# EAGLE board Final - Ready to be Milled LVRearBoard_GNDPour V2.0 100% (EAGLE 7.2.0)
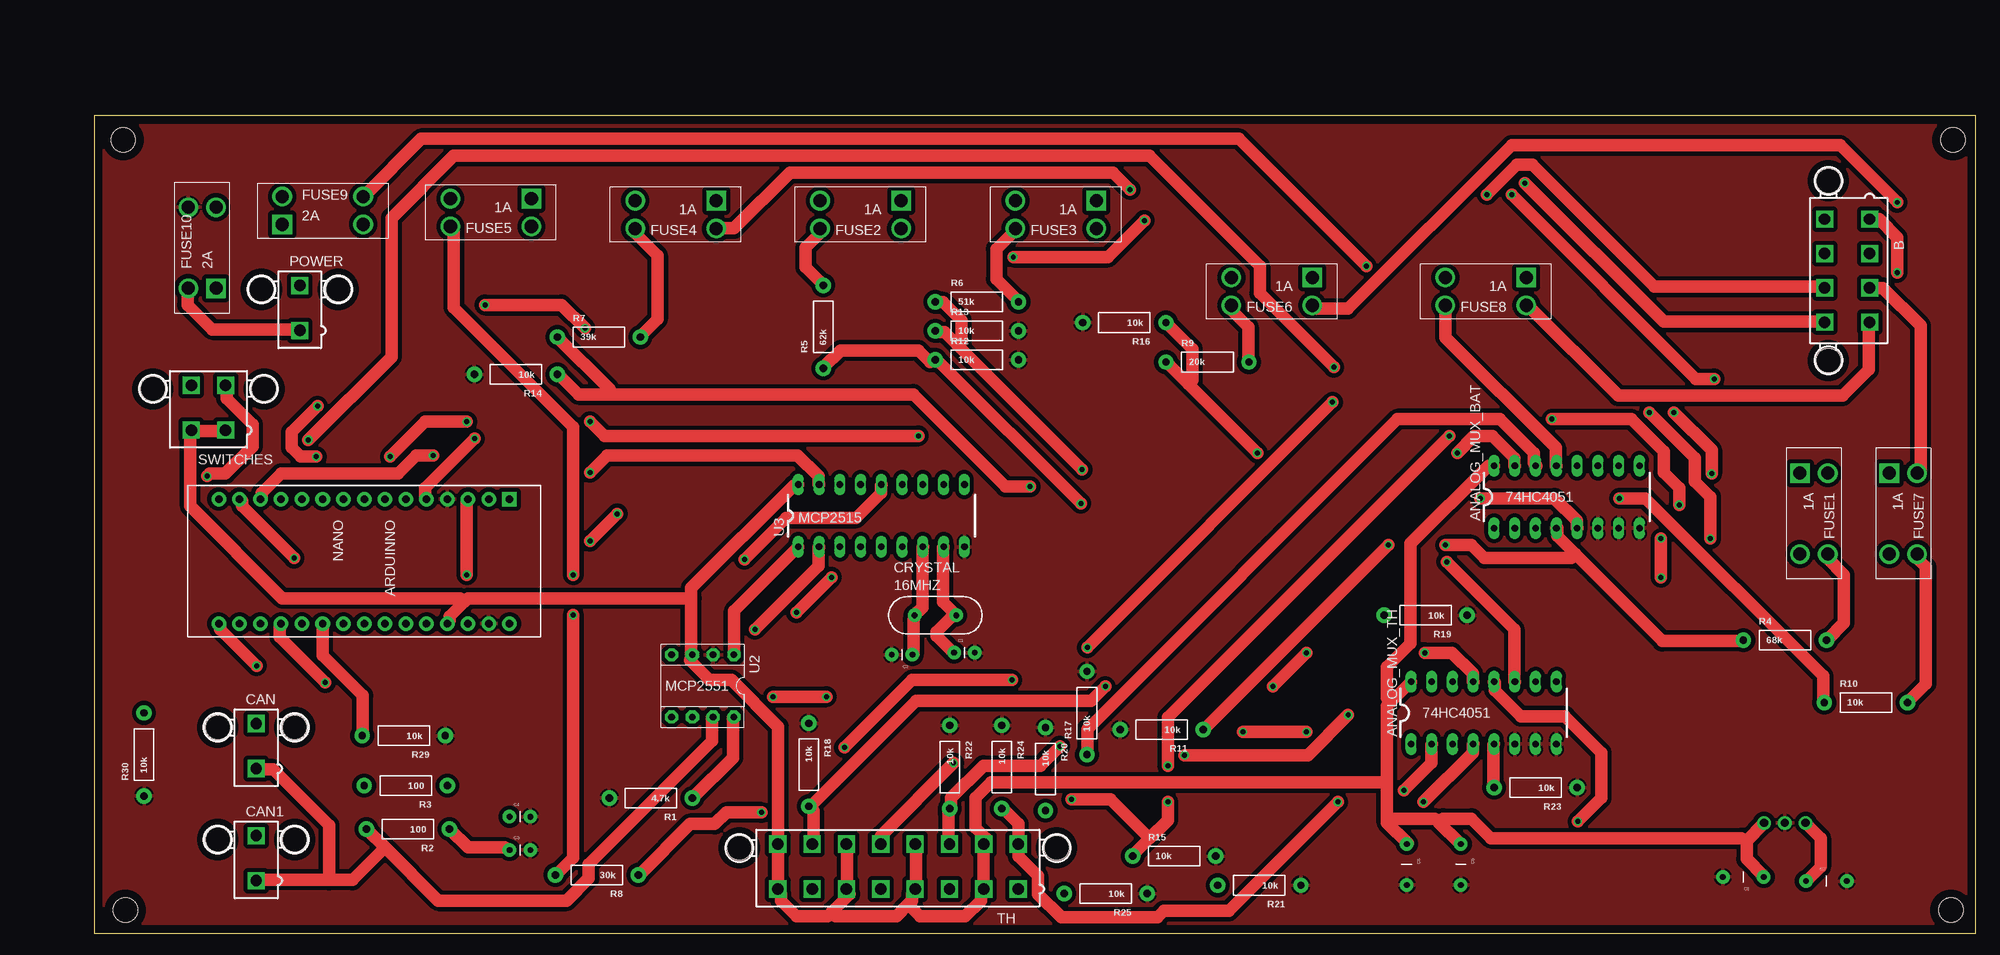
[diagram p0: board, top side]
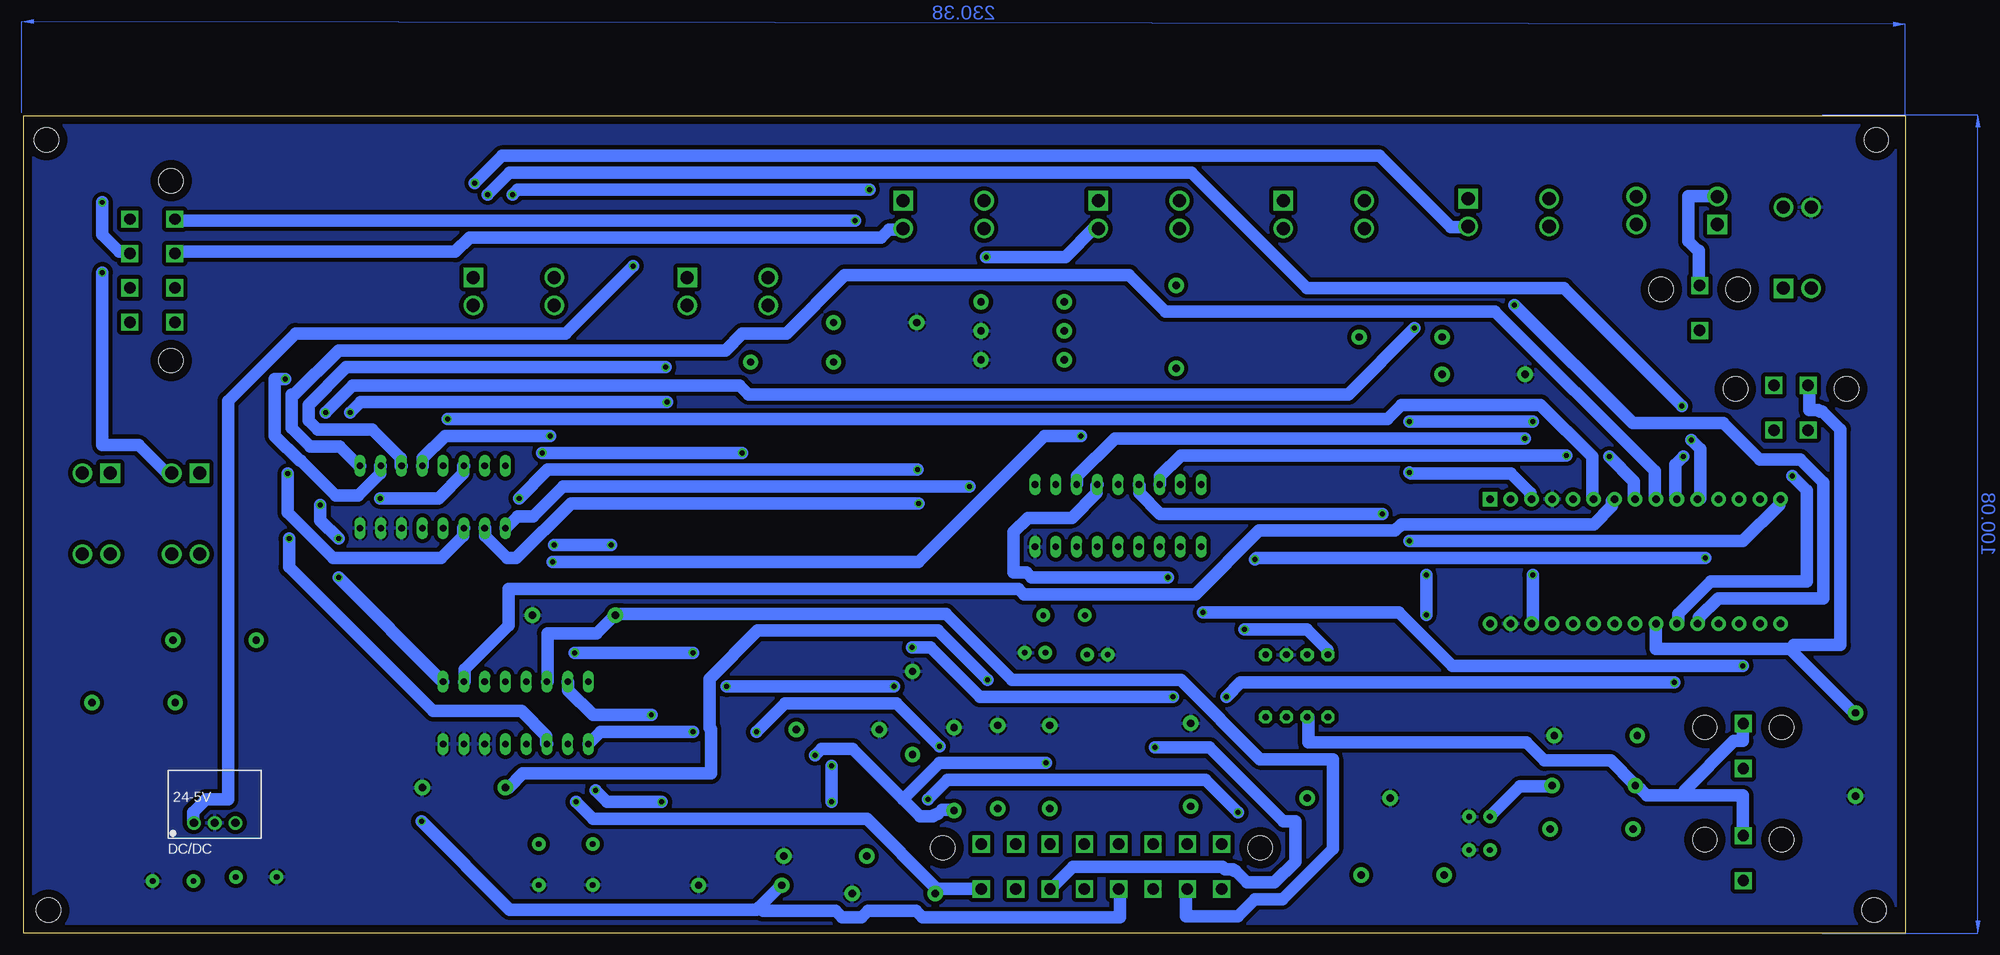
[diagram p1: board, bottom side, seen from below]

Size 230.1 x 100 mm. Coordinates in mm from the lower left corner, seen from the top.
Outline: 0,0 230.1,0 230.1,100 0,100 0,0
Copper layers (1*16): Top 0.035mm / dielectric 1.5mm / Bottom 0.035mm
Design rules "default": minimum track width 10mil, minimum drill 24mil, track to track 8mil, track to pad 8mil, pad to pad 8mil, via to via 8mil, smd to smd 8mil, copper to edge 40mil, drill to drill 8mil, minimum pad ring 10mil, minimum via ring 8mil, stop-mask expansion 4mil, vias tented up to drill 0mil, thermal gap 10mil
Net classes: 0 default: width 1.524 mm, clearance 0.508 mm; 1 Ground: width 1.524 mm, clearance 0.508 mm; 2 High Power: width 1.524 mm, clearance 0.508 mm; 3 Midium Power: width 1.524 mm, clearance 0.508 mm; 4 Low Power: width 1.524 mm, clearance 0.508 mm
Holes 3 mm at 3.56,97.03 3.81,2.79 227.08,2.79 227.33,97.03

## Footprints (pad centres in the part's own frame; a part is rotated, then mirrored left to right if it is on the bottom)
DIL16 = drill 0.813 long: 1 -8.89,-3.81; 2 -6.35,-3.81; 3 -3.81,-3.81; 4 -1.27,-3.81; 5 1.27,-3.81; 6 3.81,-3.81; 7 6.35,-3.81; 8 8.89,-3.81; 9 8.89,3.81; 10 6.35,3.81; 11 3.81,3.81; 12 1.27,3.81; 13 -1.27,3.81; 14 -3.81,3.81; 15 -6.35,3.81; 16 -8.89,3.81
ARDUINO-NANO = drill 0.914 pad 1.778 square: 1 -7.62,17.78 | drill 0.914 pad 1.778: 2 -7.62,15.24; 3 -7.62,12.7; 4 -7.62,10.16; 5 -7.62,7.62; 6 -7.62,5.08; 7 -7.62,2.54; 8 -7.62,0; 9 -7.62,-2.54; 10 -7.62,-5.08; 11 -7.62,-7.62; 12 -7.62,-10.16; 13 -7.62,-12.7; 14 -7.62,-15.24; 15 -7.62,-17.78; 16 7.62,-17.78; 17 7.62,-15.24; 18 7.62,-12.7; 19 7.62,-10.16; 20 7.62,-7.62; 21 7.62,-5.08; 22 7.62,-2.54; 23 7.62,0; 24 7.62,2.54; 25 7.62,5.08; 26 7.62,7.62; 27 7.62,10.16; 28 7.62,12.7; 29 7.62,15.24; 30 7.62,17.78
5566-8 = drill 1.4 square: 1 6.3,-2.75; 2 2.1,-2.75; 3 -2.1,-2.75; 4 -6.3,-2.75; 5 6.3,2.75; 6 2.1,2.75; 7 -2.1,2.75; 8 -6.3,2.75 | hole 3: 11,2.29; -11,2.29
CAP-PTH-SMALL = drill 0.7 pad 1.651: 1 0,0; 2 2.54,0
CAP-PTH-5MM = drill 0.7 pad 1.651: 1 -2.5,0; 2 2.5,0
5566-2 = drill 1.4 square: 1 0,-2.75; 2 0,2.75 | hole 3: 4.7,2.29; -4.7,2.29
HC49US = drill 0.7 pad 1.651: 1 -2.54,0; 2 2.54,0
SIP3 = drill 1 pad 1.676: 1 -2.54,0; 2 0,0; 3 2.54,0
KEYSTONE3568 = drill 1.6: 1A -4.953,1.702; 2A 4.953,1.702; 2B 4.953,-1.702 | drill 1.6 square: 1B -4.953,-1.702
AXIAL-0.4 = drill 0.9 pad 1.88: P$1 -5.08,0; P$2 5.08,0
5566-4 = drill 1.4 square: 1 2.1,-2.75; 2 -2.1,-2.75; 3 2.1,2.75; 4 -2.1,2.75 | hole 3: 6.8,2.29; -6.8,2.29
5566-16 = drill 1.4 square: 1 14.7,-2.75; 2 10.5,-2.75; 3 6.3,-2.75; 4 2.1,-2.75; 5 -2.1,-2.75; 6 -6.3,-2.75; 7 -10.5,-2.75; 8 -14.7,-2.75; 9 14.7,2.75; 10 10.5,2.75; 11 6.3,2.75; 12 2.1,2.75; 13 -2.1,2.75; 14 -6.3,2.75; 15 -10.5,2.75; 16 -14.7,2.75 | hole 3: 19.4,2.29; -19.4,2.29
DIL08 = drill 0.813 pad 1.6 octagon: 1 -3.81,-3.81; 2 -1.27,-3.81; 3 1.27,-3.81; 4 3.81,-3.81; 5 3.81,3.81; 6 1.27,3.81; 7 -1.27,3.81; 8 -3.81,3.81
DIL18 = drill 0.813 long: 1 -10.16,-3.81; 2 -7.62,-3.81; 3 -5.08,-3.81; 4 -2.54,-3.81; 5 0,-3.81; 6 2.54,-3.81; 7 5.08,-3.81; 8 7.62,-3.81; 9 10.16,-3.81; 10 10.16,3.81; 11 7.62,3.81; 12 5.08,3.81; 13 2.54,3.81; 14 0,3.81; 15 -2.54,3.81; 16 -5.08,3.81; 17 -7.62,3.81; 18 -10.16,3.81

## Placement (x,y rotation side)
ANALOG_MUX_BAT  74HC4051  [DIL16]  180.09,53.34 0 top
ANALOG_MUX_TH  74HC4051  [DIL16]  169.93,26.92 0 top
ARDUINNO  NANO  [ARDUINO-NANO]  33.02,45.47 270 top
B  5566-8  [5566-8]  214.38,81.03 90 top
C1  22pF  [CAP-PTH-SMALL]  105.16,34.29 0 top
C2  22pF  [CAP-PTH-SMALL]  100.08,34.04 180 top
C3  560pF  [CAP-PTH-SMALL]  50.8,10.16 0 top
C4  560pF  [CAP-PTH-SMALL]  50.8,14.22 0 top
C5  0.1uF  [CAP-PTH-5MM]  167.13,8.38 270 top
C6  0.1uF  [CAP-PTH-5MM]  160.53,8.38 270 top
C7  [CAP-PTH-5MM]  211.84,6.35 0 top
C8  [CAP-PTH-5MM]  201.68,6.86 180 top
CAN  5566-2  [5566-2]  19.81,22.86 0 top
CAN1  5566-2  [5566-2]  19.81,9.14 0 top
CRYSTAL  16MHZ  [HC49US]  102.87,38.86 0 top
DC/DC  24-5V  [SIP3]  206.76,13.46 0 bottom
FUSE1  1A  [KEYSTONE3568]  210.31,51.31 270 top
FUSE2  1A  [KEYSTONE3568]  93.73,87.88 180 top
FUSE3  1A  [KEYSTONE3568]  117.6,87.88 180 top
FUSE4  1A  [KEYSTONE3568]  71.12,87.88 180 top
FUSE5  1A  [KEYSTONE3568]  48.51,88.14 180 top
FUSE6  1A  [KEYSTONE3568]  144.02,78.49 180 top
FUSE7  1A  [KEYSTONE3568]  221.23,51.31 270 top
FUSE8  1A  [KEYSTONE3568]  170.18,78.49 180 top
FUSE9  2A  [KEYSTONE3568]  27.94,88.39 0 top
FUSE10  2A  [KEYSTONE3568]  13.21,83.82 90 top
POWER  5566-2  [5566-2]  25.15,76.45 0 top
R1  4.7k  [AXIAL-0.4]  68.07,16.51 180 top
R2  100  [AXIAL-0.4]  38.35,12.7 180 top
R3  100  [AXIAL-0.4]  38.1,18.03 180 top
R4  68k  [AXIAL-0.4]  206.76,35.81 0 top
R5  62k  [AXIAL-0.4]  89.15,74.17 90 top
R6  51k  [AXIAL-0.4]  107.95,77.22 0 top
R7  39k  [AXIAL-0.4]  61.72,72.9 0 top
R8  30k  [AXIAL-0.4]  61.47,7.11 180 top
R9  20k  [AXIAL-0.4]  136.14,69.85 0 top
R10  10k  [AXIAL-0.4]  216.66,28.19 0 top
R11  10k  [AXIAL-0.4]  130.56,24.89 180 top
R12  10k  [AXIAL-0.4]  107.95,70.1 0 top
R13  10k  [AXIAL-0.4]  107.95,73.66 0 top
R14  10k  [AXIAL-0.4]  51.56,68.33 180 top
R15  10k  [AXIAL-0.4]  132.08,9.4 0 top
R16  10k  [AXIAL-0.4]  125.98,74.68 180 top
R17  10k  [AXIAL-0.4]  121.41,26.92 90 top
R18  10k  [AXIAL-0.4]  87.38,20.57 270 top
R19  10k  [AXIAL-0.4]  162.81,38.86 180 top
R20  10k  [AXIAL-0.4]  116.33,20.07 270 top
R21  10k  [AXIAL-0.4]  142.49,5.84 180 top
R22  10k  [AXIAL-0.4]  104.65,20.32 270 top
R23  10k  [AXIAL-0.4]  176.28,17.78 180 top
R24  10k  [AXIAL-0.4]  111,20.32 270 top
R25  10k  [AXIAL-0.4]  123.7,4.83 180 top
R29  10k  [AXIAL-0.4]  37.85,24.13 180 top
R30  10k  [AXIAL-0.4]  6.1,21.84 90 top
SWITCHES  5566-4  [5566-4]  13.97,64.26 0 top
TH  5566-16  [5566-16]  98.3,8.13 0 top
U2  MCP2551  [DIL08]  74.42,30.23 180 top
U3  MCP2515  [DIL18]  96.27,51.05 0 top

## Library data of the parts
ANALOG_MUX_BAT ANALOG_MUX_TH = SparkFun-AnalogIC
ARDUINNO = Arduino Nano2
B SWITCHES TH = con-molex; OC_FARNELL: unknown; OC_NEWARK: unknown
C1-C4 = SparkFun-Passives
C5-C8 = SparkFun-Capacitors
CAN CAN1 POWER = con-molex; OC_FARNELL: 1822072; OC_NEWARK: unknown
CRYSTAL = SparkFun-FreqCtrl
DC/DC = dc-dc-converter
FUSE1-FUSE10 = fuse
R1-R25 R29 R30 = SparkFun-Resistors
U2 U3 = SparkFun-DigitalIC

## Nets
3V3: ARDUINNO.17
5V [Low Power]: ANALOG_MUX_BAT.16 ANALOG_MUX_TH.16 ARDUINNO.27 C5.1 C6.1 C8.1 DC/DC.3 SWITCHES.1 SWITCHES.2 TH.2 TH.4 TH.6 TH.8 TH.10 TH.12 TH.14 TH.16 U2.3 U3.18
A_BAT: ANALOG_MUX_BAT.11 ARDUINNO.11
A_TH: ANALOG_MUX_TH.11 ARDUINNO.8
ANALOG_BAT: ANALOG_MUX_BAT.3 ARDUINNO.20
ANALOG_TH: ANALOG_MUX_TH.3 ARDUINNO.19
B3 [Midium Power]: ANALOG_MUX_BAT.13 FUSE8.2A
B6 [Midium Power]: ANALOG_MUX_BAT.14 R10.P$1 R17.P$1
B9: ANALOG_MUX_BAT.15 R9.P$1 R16.P$1
B12 [Midium Power]: ANALOG_MUX_BAT.12 R8.P$1 R15.P$1
B15 [Midium Power]: ANALOG_MUX_BAT.1 R7.P$1 R14.P$1
B18 [Midium Power]: ANALOG_MUX_BAT.5 R6.P$1 R13.P$1
B21 [Midium Power]: ANALOG_MUX_BAT.2 R5.P$1 R12.P$1
B24 [Midium Power]: ANALOG_MUX_BAT.4 R4.P$1 R11.P$1
B_BAT: ANALOG_MUX_BAT.10 ARDUINNO.10
B_TH: ANALOG_MUX_TH.10 ARDUINNO.7
BMS: ARDUINNO.22 R30.P$2 SWITCHES.4
C_BAT: ANALOG_MUX_BAT.9 ARDUINNO.9
C_TH: ANALOG_MUX_TH.9 ARDUINNO.6
CAN_CS: ARDUINNO.13 U3.16
CAN_INT: ARDUINNO.5 U3.12
CAN_TX: U2.1 U3.1
CANH: CAN1.1 CAN.1 R2.P$2 U2.7
CANL: CAN1.2 CAN.2 R3.P$2 U2.6
GND: ANALOG_MUX_BAT.6 ANALOG_MUX_BAT.7 ANALOG_MUX_BAT.8 ANALOG_MUX_TH.6 ANALOG_MUX_TH.7 ANALOG_MUX_TH.8 ARDUINNO.4 ARDUINNO.29 C1.2 C2.2 C3.2 C4.2 C5.2 C6.2 C7.2 C8.2 DC/DC.2 FUSE10.2A R1.P$2 R11.P$2 R12.P$2 R13.P$2 R14.P$2 R15.P$2 R16.P$2 R17.P$2 R18.P$1 R19.P$1 R20.P$1 R21.P$1 R22.P$1 R23.P$1 R24.P$1 R25.P$1 R29.P$1 R30.P$1 U2.2 U3.9
IMD: ARDUINNO.21 R29.P$2 SWITCHES.3
MISO: ARDUINNO.15 U3.15
MOSI: ARDUINNO.14 U3.14
N$1 [High Power]: FUSE9.1A POWER.2
N$2: C3.1 R2.P$1
N$3: B.8 FUSE5.1A
N$4: C2.1 CRYSTAL.1 U3.7
N$5: C4.1 R3.P$1
N$6: B.7 FUSE4.1A
N$7: C7.1 DC/DC.1 FUSE9.2A
N$8 [Midium Power]: FUSE2.2A R5.P$2
N$9 [Midium Power]: FUSE1.2A R4.P$2
N$10 [Midium Power]: FUSE3.2A R6.P$2
N$11 [Midium Power]: FUSE4.2A R7.P$2
N$12 [Midium Power]: FUSE5.2A R8.P$2
N$13 [Midium Power]: FUSE6.2A R9.P$2
N$14 [Midium Power]: FUSE7.2A R10.P$2
N$15: B.6 FUSE3.1A
N$16: B.5 FUSE2.1A
N$17: B.1 FUSE1.1A
N$18: B.2 FUSE6.1A
N$20: B.3 FUSE7.1A
N$21: B.4 FUSE8.1A
N$22 [Ground]: FUSE10.1A POWER.1
N$29: U2.4 U3.2
OSC1: C1.1 CRYSTAL.2 U3.8
RS: ARDUINNO.3 ARDUINNO.28 U3.17
RS$: R1.P$1 U2.8
SCK: ARDUINNO.16 U3.13
TH1: ANALOG_MUX_TH.13 R18.P$2 TH.15
TH2: ANALOG_MUX_TH.14 R19.P$2 TH.7
TH3: ANALOG_MUX_TH.15 R20.P$2 TH.13
TH4: ANALOG_MUX_TH.12 R21.P$2 TH.5
TH5: ANALOG_MUX_TH.1 R22.P$2 TH.11
TH6: ANALOG_MUX_TH.5 R23.P$2 TH.3
TH7: ANALOG_MUX_TH.2 R24.P$2 TH.9
TH8: ANALOG_MUX_TH.4 R25.P$2 TH.1
VIN: ARDUINNO.30

## Tracks (layer width: path | path; a pad name or v marks a point on that pad's centre or on a via)
5V
  Top 1.524: 202.09,11.27 202.09,9.05 204.15,6.99 C8.1 | 202.09,11.27 204.15,13.34 DC/DC.3 | 158.59,28.26 158.12,27.78 158.12,18.41 | 158.59,28.26 160.97,30.64 ANALOG_MUX_TH.16 | 158.12,13.97 158.12,13.49 160.66,10.95 C6.1 | 158.12,13.97 158.12,18.41 | ANALOG_MUX_BAT.16 170.5,57.15 160.97,47.62 160.97,35.4 158.12,32.54 158.12,28.73 158.59,28.26 | 164.47,13.49 163.99,13.97 158.12,13.97 | 164.47,13.49 167,10.95 C5.1 | 202.09,11.27 201.45,11.59 170.81,11.59 168.43,13.97 164.94,13.97 164.47,13.49 | TH.12 100.49,10.79 100.49,5.4 TH.4 100.01,4.76 100.01,3.97 99.54,3.49 | TH.14 92.08,10.79 92.08,5.4 TH.6 92.39,4.76 90.17,2.54 | 90.17,2.54 89.69,2.06 85.88,2.06 83.98,3.97 83.98,4.76 TH.8 83.66,5.4 83.66,10.79 TH.16 83.66,11.59 83.66,25.24 77.95,30.96 75.25,30.96 72.87,33.34 U2.3 73.03,34.13 73.03,40.96 | 99.54,3.49 98.11,2.06 90.65,2.06 90.17,2.54 | 99.54,3.49 100.97,2.06 106.52,2.06 108.43,3.97 108.43,4.76 TH.2 108.74,5.4 108.74,10.79 TH.10 109.06,11.59 107.79,12.86 107.79,16.51 109.7,18.41 158.12,18.41 | SWITCHES.1 16.03,61.44 11.91,61.44 SWITCHES.2 11.75,60.8 11.75,52.23 23.02,40.96 44.77,40.96 45.24,40.48 | 73.03,40.96 73.03,42.23 85.57,54.77 86.04,54.77 U3.18 | 45.24,40.48 45.72,40.96 73.03,40.96 | 45.24,40.48 43.5,38.73 43.5,38.26 43.18,37.94 ARDUINNO.27
A_BAT  (via drill 0.61)
  Top 1.524: v151.61,69.22 142.56,78.26 142.56,81.6 129.06,95.09 43.97,95.09 36.35,87.47 36.35,70.48 v26.19,60.33
  Bottom 1.524: v151.61,69.22 190.66,69.22 195.26,64.61 195.26,62.71 194.15,61.59 187.48,61.59 183.99,58.1 183.99,57.15 ANALOG_MUX_BAT.11 | v26.19,60.33 25.08,59.21 25.08,53.18 25.4,53.18 ARDUINNO.11
A_TH  (via drill 0.61)
  Top 1.524: v165.42,45.4 173.67,37.15 173.67,30.8 ANALOG_MUX_TH.11 | v100.81,60.8 62.39,60.8 v60.64,62.55 | v45.56,62.55 40.48,62.55 v36.2,58.26
  Bottom 1.524: v165.42,45.4 120.65,45.4 105.25,60.8 v100.81,60.8 | v45.56,62.55 v60.64,62.55 | v36.2,58.26 33.18,55.24 33.18,53.02 33.02,53.02 ARDUINNO.8
ANALOG_BAT  (via drill 0.61)
  Top 1.524: v197.8,56.2 197.8,59.05 v193.2,63.66 | v60.01,73.98 57.15,76.83 v47.78,76.83
  Bottom 1.524: v197.8,56.2 197.8,51.44 192.25,45.88 179.07,45.88 176.37,48.58 176.37,49.53 ANALOG_MUX_BAT.3 | v193.2,63.66 189.87,66.99 142.56,66.99 141.45,65.88 68.1,65.88 v60.01,73.98 | v47.78,76.83 33.34,62.39 22.23,62.39 17.78,57.94 12.86,57.94 10,55.09 10,40.96 22.86,40.96 25.24,38.58 25.24,37.78 25.4,37.78 ARDUINNO.20
ANALOG_TH  (via drill 0.61)
  Top 1.524: v197.64,48.26 197.64,53.34 195.74,55.24 195.74,58.1 v190.18,63.66 | v121.44,34.92 v151.45,64.93 | v83.03,28.89 v89.53,28.89 | v28.26,30.64 22.7,36.2 22.7,37.78 22.86,37.94 ARDUINNO.19
  Bottom 1.524: v197.64,48.26 197.64,44.77 180.02,27.15 169.23,27.15 166.21,24.13 166.21,23.18 ANALOG_MUX_TH.3 | v190.18,63.66 188.91,64.93 v151.45,64.93 | v121.44,34.92 119.22,34.92 113.19,28.89 v89.53,28.89 | v83.03,28.89 81.28,30.64 v28.26,30.64
B3
  Top 1.524: ANALOG_MUX_BAT.13 178.75,57.15 178.75,59.37 165.26,72.87 165.26,76.68 FUSE8.2A
B6  (via drill 0.61)
  Top 1.524: v186.53,53.18 189.71,53.18 211.46,31.43 211.46,28.26 R10.P$1 | R17.P$1 121.44,21.91 121.44,24.92 159.38,62.87 171.93,62.87 176.05,58.74 176.05,57.47 176.37,57.15 ANALOG_MUX_BAT.14
  Bottom 1.524: v186.53,53.18 179.39,53.18 176.37,56.2 176.37,57.15 ANALOG_MUX_BAT.14
B9  (via drill 0.61)
  Top 1.524: v166.69,58.74 168.75,60.8 170.97,60.8 173.67,58.1 173.67,57.15 ANALOG_MUX_BAT.15 | 133.83,67.15 131.13,69.85 R9.P$1 | 133.83,67.15 v142.24,58.74 | R16.P$1 134.3,71.44 134.3,67.63 133.83,67.15
  Bottom 1.524: v142.24,58.74 v166.69,58.74
B12  (via drill 0.61)
  Top 1.524: v165.74,60.8 131.29,26.35 v131.29,20.48 | v131.29,16.03 131.29,13.81 129.06,11.59 | 129.06,11.59 127,9.53 R15.P$1 | v81.6,14.76 77.31,14.76 75.88,13.34 72.87,13.34 66.67,7.14 R8.P$1 | v119.54,16.35 124.3,16.35 129.06,11.59
  Bottom 1.524: v165.74,60.8 178.59,60.8 181.29,58.1 181.29,57.15 ANALOG_MUX_BAT.12 | v131.29,16.03 v131.29,20.48 | v81.6,14.76 85.57,18.73 117.16,18.73 v119.54,16.35
B15  (via drill 0.61)
  Top 1.524: v114.46,54.61 111.44,54.61 100.17,65.88 63.02,65.88 | 63.02,65.88 59.21,65.88 56.67,68.42 R14.P$1 | R7.P$1 63.02,66.52 63.02,65.88
  Bottom 1.524: v114.46,54.61 164.15,54.61 167.8,50.96 169.7,50.96 171.13,49.53 ANALOG_MUX_BAT.1
B18  (via drill 0.61)
  Top 1.524: v169.54,53.18 178.59,53.18 181.29,50.48 181.29,49.53 ANALOG_MUX_BAT.5 | 105.57,71.91 103.98,73.5 103.19,73.5 103.03,73.66 R13.P$1 | 105.57,71.91 v120.81,56.67 | R6.P$1 102.87,77.15 103.82,77.15 106.05,74.93 106.05,72.39 105.57,71.91
  Bottom 1.524: v169.54,53.18 166.05,56.67 v120.81,56.67
B21  (via drill 0.61)
  Top 1.524: v120.65,52.55 103.03,70.17 102.87,70.17 R12.P$1 102.23,69.85 100.81,71.28 91.28,71.28 89.22,69.22 R5.P$1
  Bottom 1.524: v120.65,52.55 163.19,52.55 169.86,45.88 170.97,45.88 173.67,48.58 173.67,49.53 ANALOG_MUX_BAT.2
B24  (via drill 0.61)
  Top 1.524: 181.13,46.35 191.77,35.72 201.61,35.72 R4.P$1 | 181.13,46.35 178.91,48.58 178.91,49.53 ANALOG_MUX_BAT.4 | v158.27,47.47 135.73,24.92 R11.P$1 | v165.26,47.47 168.43,47.47 170.02,45.88 180.66,45.88 181.13,46.35
  Bottom 1.524: v165.26,47.47 v158.27,47.47
B_BAT  (via drill 0.61)
  Top 1.524: v198.12,67.79 195.9,67.79 v173.35,90.33 | v27.3,64.45 24.13,61.28 24.13,59.37 25.24,58.26 v27.15,58.26
  Bottom 1.524: v198.12,67.79 199.39,67.79 199.39,60.8 196.37,57.78 196.22,57.78 191.93,53.5 189.23,53.5 186.53,56.2 186.53,57.15 ANALOG_MUX_BAT.10 | v173.35,90.33 170.66,93.03 87.31,93.03 73.18,78.9 41.75,78.9 v27.3,64.45 | v27.15,58.26 28.1,57.31 28.1,53.02 27.94,53.02 ARDUINNO.10
B_TH
  Bottom 1.524: ANALOG_MUX_TH.10 176.21,30.8 176.21,32.23 170.81,37.62 170.81,42.07 108.43,42.07 107.79,41.43 86.84,41.43 79.06,49.21 62.39,49.21 61.59,50.01 38.1,50.01 35.88,52.23 35.88,52.86 35.72,53.02 35.56,53.02 ARDUINNO.7
BMS
  Bottom 1.524: ARDUINNO.22 30.48,34.77 14.13,34.77 | 14.13,34.77 6.35,26.99 6.19,26.99 R30.P$2 | SWITCHES.4 11.75,66.99 11.75,63.98 10.64,63.98 10.48,63.82 10.16,63.82 7.94,61.59 7.94,35.24 13.65,35.24 14.13,34.77
C_BAT
  Bottom 1.524: ANALOG_MUX_BAT.9 189.07,57.15 191.45,59.53 195.1,59.53 197.33,61.75 197.33,65.88 197.01,65.88 191.61,71.28 144.3,71.28 142.24,73.34 136.84,73.34 129.7,80.49 94.93,80.49 90.49,76.04 50.16,76.04 30.64,56.52 30.64,53.02 30.48,53.02 ARDUINNO.9
C_TH  (via drill 0.61)
  Top 1.524: v191.61,48.26 v191.61,43.5 | v193.83,52.39 193.83,54.45 191.93,56.36 191.93,58.9 187.96,62.87 v178.28,62.87
  Bottom 1.524: v191.61,43.5 178.91,30.8 ANALOG_MUX_TH.9 | v191.61,48.26 193.83,50.48 v193.83,52.39 | v178.28,62.87 63.34,62.87 61.59,64.61 44.61,64.61 38.26,58.26 38.26,53.02 38.1,53.02 ARDUINNO.6
CAN_CS  (via drill 0.61)
  Top 1.524: v41.43,58.42 39.37,58.42 37.15,56.2 22.86,56.2 20.48,53.82 20.48,53.18 20.32,53.02 ARDUINNO.13
  Bottom 1.524: v41.43,58.42 88.58,58.42 91.12,55.88 91.12,54.93 U3.16
CAN_INT  (via drill 0.61)
  Top 1.524: v46.51,60.48 40.48,54.45 40.48,53.18 40.64,53.02 ARDUINNO.5
  Bottom 1.524: v46.51,60.48 96.68,60.48 101.28,55.88 101.28,54.93 U3.12
CAN_TX
  Top 1.524: U3.1 86.04,47.15 78.26,39.37 78.26,34.13 U2.1
CANH
  Top 1.524: 35.56,10.48 33.34,12.7 R2.P$2 | 35.56,10.48 42.07,3.97 57.78,3.97 60.48,6.67 60.48,8.41 75.56,23.5 75.56,26.35 U2.7 | 28.73,6.51 31.59,6.51 35.56,10.48 | 28.73,6.51 19.84,6.51 CAN1.1 | 28.73,6.51 28.73,13.18 21.91,20 19.84,20 CAN.1
CANL
  Bottom 1.524: U2.6 73.03,26.35 73.03,23.34 46.35,23.34 44.13,21.11 36.04,21.11 33.18,18.26 33.18,18.1 33.02,18.1 R3.P$2 32.38,17.62 31.59,16.83 26.99,16.83 | 26.99,16.83 19.84,16.83 19.84,11.91 CAN1.2 | CAN.2 19.84,25.56 19.84,23.5 20.95,23.5 26.99,17.46 26.99,16.83
GND
  pour Bottom: -2.29,101.09 231.14,100.58 231.39,-1.27 -2.79,-0.76
  pour Top: -2.54,101.09 231.39,100.84 231.14,-1.02 -2.79,-0.76
IMD  (via drill 0.61)
  Top 1.524: ARDUINNO.21 27.94,33.97 32.86,29.05 32.86,24.13 R29.P$2 | v13.81,55.88 14.13,56.2 16.03,56.2 19.37,59.53 19.37,62.23 16.19,65.41 16.19,66.99 SWITCHES.3
  Bottom 1.524: v13.81,55.88 12.06,54.13 12.06,43.02 23.81,43.02 27.78,39.05 27.78,37.78 27.94,37.78 ARDUINNO.21
MISO  (via drill 0.61)
  Top 1.524: v60.64,47.94 v63.98,51.28
  Bottom 1.524: v63.98,51.28 91.12,51.28 93.66,53.82 93.66,54.77 U3.15 | v60.64,47.94 19.84,47.94 15.4,52.39 15.4,53.02 15.24,53.02 ARDUINNO.15
MOSI  (via drill 0.61)
  Top 1.524: v79.53,45.72 84.61,50.8 93.19,50.8 96.2,53.82 96.2,54.77 U3.14 | v24.45,45.88 18.1,52.23 18.1,52.86 17.78,53.18 ARDUINNO.14
  Bottom 1.524: v79.53,45.72 79.38,45.88 v24.45,45.88
N$1
  Bottom 1.524: POWER.2 25.24,79.22 25.24,83.5 25.4,83.5 26.51,84.61 26.51,90.17 23.02,90.17 FUSE9.1A
N$2
  Top 1.524: C3.1 50.16,10.48 45.72,10.48 43.5,12.7 R2.P$1
N$3  (via drill 0.61)
  Top 1.524: v174.94,91.76 191.93,74.77 211.61,74.77 B.8
  Bottom 1.524: v174.94,91.76 171.61,95.09 64.29,95.09 55.56,86.36 53.5,86.36 FUSE5.1A
N$4
  Top 1.524: U3.7 101.28,47.15 101.28,39.85 100.33,38.89 CRYSTAL.1 100.17,38.26 100.17,34.13 C2.1
N$5
  Bottom 1.524: C4.1 50.8,14.29 47.15,17.94 43.5,17.94 43.34,18.1 43.18,18.1 R3.P$1
N$6  (via drill 0.61)
  Top 1.524: v170.34,90.33 173.99,93.98 175.9,93.98 190.82,79.06 211.61,79.06 B.7 | v126.68,90.96 124.62,93.03 85.09,93.03 78.26,86.2 76.2,86.2 FUSE4.1A
  Bottom 1.524: v170.34,90.33 169.7,90.96 v126.68,90.96
N$7  (via drill 0.61)
  Top 1.524: C7.1 209.39,6.35 211.14,8.1 211.14,11.59 209.39,13.34 DC/DC.1 | v155.57,81.6 140.02,97.16 40.01,97.16 33.02,90.17 FUSE9.2A
  Bottom 1.524: v155.57,81.6 163.83,73.34 196.85,73.34 205.1,65.09 205.1,16.35 207.8,16.35 209.39,14.76 209.39,13.49 DC/DC.1
N$8
  Top 1.524: R5.P$2 89.06,79.38 87,81.44 87,83.82 88.9,85.72 88.9,86.04 FUSE2.2A
N$9
  Top 1.524: R4.P$2 211.93,35.88 214,37.94 214,43.81 211.93,45.88 211.93,46.35 FUSE1.2A
N$10
  Top 1.524: R6.P$2 113.03,77.31 110.33,80.01 110.33,83.66 112.71,86.04 FUSE3.2A
N$11
  Top 1.524: R7.P$2 66.83,73.03 68.9,75.09 68.9,82.87 66.04,85.72 66.04,86.04 FUSE4.2A
N$12  (via drill 0.61)
  Top 1.524: v58.58,38.89 58.58,9.21 56.52,7.14 R8.P$2 | v58.58,43.81 58.58,61.91 43.97,76.52 43.97,86.04 43.66,86.36 FUSE5.2A
  Bottom 1.524: v58.58,43.81 v58.58,38.89
N$13
  Top 1.524: FUSE6.2A 139.06,76.2 141.13,74.14 141.13,69.85 R9.P$2
N$14
  Top 1.524: R10.P$2 221.77,28.26 224,30.48 224,44.77 222.88,45.88 222.88,46.35 FUSE7.2A
N$15
  Bottom 1.524: B.6 211.61,83.19 211.46,83.34 177.32,83.34 175.58,85.09 125.25,85.09 124.3,86.04 122.56,86.04 FUSE3.1A
N$16  (via drill 0.61)
  Top 1.524: v128.43,87.15 123.98,82.71 v112.39,82.71
  Bottom 1.524: v128.43,87.15 211.46,87.15 211.61,87.31 B.5 | v112.39,82.71 102.71,82.71 99.22,86.2 98.74,86.2 FUSE2.1A
N$17  (via drill 0.61)
  Top 1.524: v220.5,80.8 220.5,85.09 218.28,87.31 217.17,87.31 B.1
  Bottom 1.524: v220.5,80.8 220.5,59.69 216.06,59.69 212.57,56.2 212.09,56.2 FUSE1.1A
N$18  (via drill 0.61)
  Top 1.524: v220.5,89.38 213.52,96.36 173.35,96.36 153.35,76.36 149.38,76.36 149.07,76.68 FUSE6.1A
  Bottom 1.524: v220.5,89.38 220.5,85.41 218.44,83.34 217.33,83.34 217.17,83.19 B.2
N$20
  Top 1.524: B.3 217.17,78.9 218.76,78.9 223.36,74.3 223.36,56.67 223.04,56.36 FUSE7.1A
N$21
  Top 1.524: B.4 217.01,74.61 217.01,68.9 213.84,65.72 186.37,65.72 175.26,76.83 FUSE8.1A
N$22
  Top 1.524: POWER.1 25.08,73.82 14.45,73.82 11.43,76.83 11.43,78.74 FUSE10.1A
N$29  (via drill 0.61)
  Top 1.524: v80.8,37.15 88.58,44.93 88.58,47.15 U3.2
  Bottom 1.524: v80.8,37.15 73.18,37.15 70.64,34.61 70.64,34.13 U2.4
OSC1
  Top 1.524: U3.8 103.82,47.15 103.82,40.48 105.41,38.89 CRYSTAL.2 104.78,38.58 103.03,36.83 103.03,36.35 105.09,34.29 C1.1
RS  (via drill 0.61)
  Top 1.524: v60.64,56.36 62.71,58.42 86.04,58.42 88.58,55.88 88.58,54.93 U3.17 | v45.56,43.81 45.56,53.02 45.72,53.18 ARDUINNO.3
  Bottom 1.524: v60.64,56.36 60.48,56.2 48.26,56.2 45.88,53.82 45.88,53.02 45.72,53.02 ARDUINNO.3 | v45.56,43.81 45.56,38.1 45.72,37.94 ARDUINNO.28
RS$
  Top 1.524: U2.8 78.11,26.35 78.11,21.43 73.18,16.51 R1.P$1
SCK  (via drill 0.61)
  Top 1.524: v85.88,39.21 v90.17,43.5 | v19.84,32.7 15.4,37.15 15.4,37.78 15.24,37.94 ARDUINNO.16
  Bottom 1.524: v90.17,43.5 106.84,43.5 107.47,44.13 109.06,44.13 109.06,49.05 107.31,50.8 101.92,50.8 98.9,53.82 98.9,54.77 U3.13 | v85.88,39.21 61.91,39.21 55.4,32.7 v19.84,32.7
TH1  (via drill 0.61)
  Top 1.524: v162.72,34.29 166.05,34.29 168.59,31.75 168.59,30.8 ANALOG_MUX_TH.13 | v144.15,30.16 v148.27,34.29 | v123.67,30.16 121.92,28.42 100.49,28.42 87.47,15.4 R18.P$2 87.95,14.92 87.95,10.95 TH.15
  Bottom 1.524: v148.27,34.29 v162.72,34.29 | v123.67,30.16 v144.15,30.16
TH2
  Bottom 1.524: ANALOG_MUX_TH.14 166.05,30.8 166.05,36.67 160.02,36.67 157.96,38.73 157.8,38.73 R19.P$2 157,39.05 117.32,39.05 109.22,30.96 88.58,30.96 78.9,21.27 70.01,21.27 70.01,10.32 76.2,4.13 79.53,4.13 81.6,2.06 87.95,2.06 87.95,5.24 TH.7
TH3  (via drill 0.61)
  Top 1.524: v153.35,26.67 148.43,21.75 v133.35,21.75 | v105.09,20.8 96.2,11.91 96.2,10.95 TH.13
  Bottom 1.524: v153.35,26.67 160.5,26.67 163.51,29.69 163.51,30.64 ANALOG_MUX_TH.15 | v133.35,21.75 132.56,22.54 128.75,22.54 122.56,16.35 | 122.56,16.35 120.49,14.29 118.9,14.29 118.75,14.45 118.59,14.45 118.43,14.61 118.27,14.61 117.79,15.08 116.36,15.08 R20.P$2 | v105.09,20.8 118.11,20.8 122.56,16.35
TH4  (via drill 0.61)
  Top 1.524: v181.45,13.65 184.31,16.51 184.31,22.07 179.86,26.51 174.47,26.51 171.29,29.69 171.29,30.64 ANALOG_MUX_TH.12
  Bottom 1.524: v181.45,13.65 170.66,2.86 140.49,2.86 140.18,3.17 | 140.18,3.17 137.64,5.71 137.48,5.71 R21.P$2 | TH.5 96.04,5.24 96.04,1.91 120.17,1.91 120.97,2.7 126.84,2.7 127.64,1.91 130.02,1.91 130.81,2.7 139.7,2.7 140.18,3.17
TH5  (via drill 0.61)
  Top 1.524: v140.49,24.61 v148.27,24.61 | v118.11,22.86 115.73,20.48 108.74,20.48 104.78,16.51 104.78,15.24 R22.P$2 104.46,14.61 104.46,10.95 TH.11
  Bottom 1.524: ANALOG_MUX_TH.1 159.54,24.61 v148.27,24.61 | v140.49,24.61 137,28.1 123.35,28.1 v118.11,22.86
TH6  (via drill 0.61)
  Top 1.524: ANALOG_MUX_TH.5 171.13,23.02 171.13,17.78 R23.P$2 | v91.76,22.7 100.01,30.96 v112.24,30.96
  Bottom 1.524: v91.76,22.7 85.09,22.7 76.04,13.65 74.61,13.65 74.61,8.73 77.15,6.19 80.49,6.19 81.92,7.62 82.07,7.62 82.23,7.78 83.19,7.78 83.5,8.1 101.76,8.1 104.46,5.4 TH.3 | v112.24,30.96 118.27,36.99 140.34,36.99 146.21,31.11 146.21,25.08 146.05,24.92 146.05,19.53 169.07,19.53 170.81,17.78 R23.P$2
TH7  (via drill 0.61)
  Top 1.524: v160.18,17.46 163.51,20.8 163.51,23.02 ANALOG_MUX_TH.2 | v152.08,16.03 138.75,2.7 130.81,2.7 130.02,1.91 118.27,1.91 115.41,4.76 115.41,6.99 113.03,9.37 113.03,10.79 TH.9 113.03,11.59 113.03,13.34 111.12,15.24 R24.P$2
  Bottom 1.524: v160.18,17.46 158.75,16.03 v152.08,16.03
TH8  (via drill 0.61)
  Top 1.524: v162.56,16.03 168.59,22.07 168.59,23.02 ANALOG_MUX_TH.4
  Bottom 1.524: v162.56,16.03 160.5,13.97 127,13.97 118.59,5.56 118.59,4.92 R25.P$2 117.95,5.4 113.03,5.4 TH.1
(copper drawn outside any net)
  shapes: Bottom area x2